# Altium PCB Reciever.PcbDoc
Units mm, origin at the board's own origin, x right, y up, seen from the top; angles counter-clockwise.
Board outline 55.75 x 46 mm, 2 copper layers (Top Layer, Bottom Layer); 9 components, 27 nets, 76 pads, 1 vias.
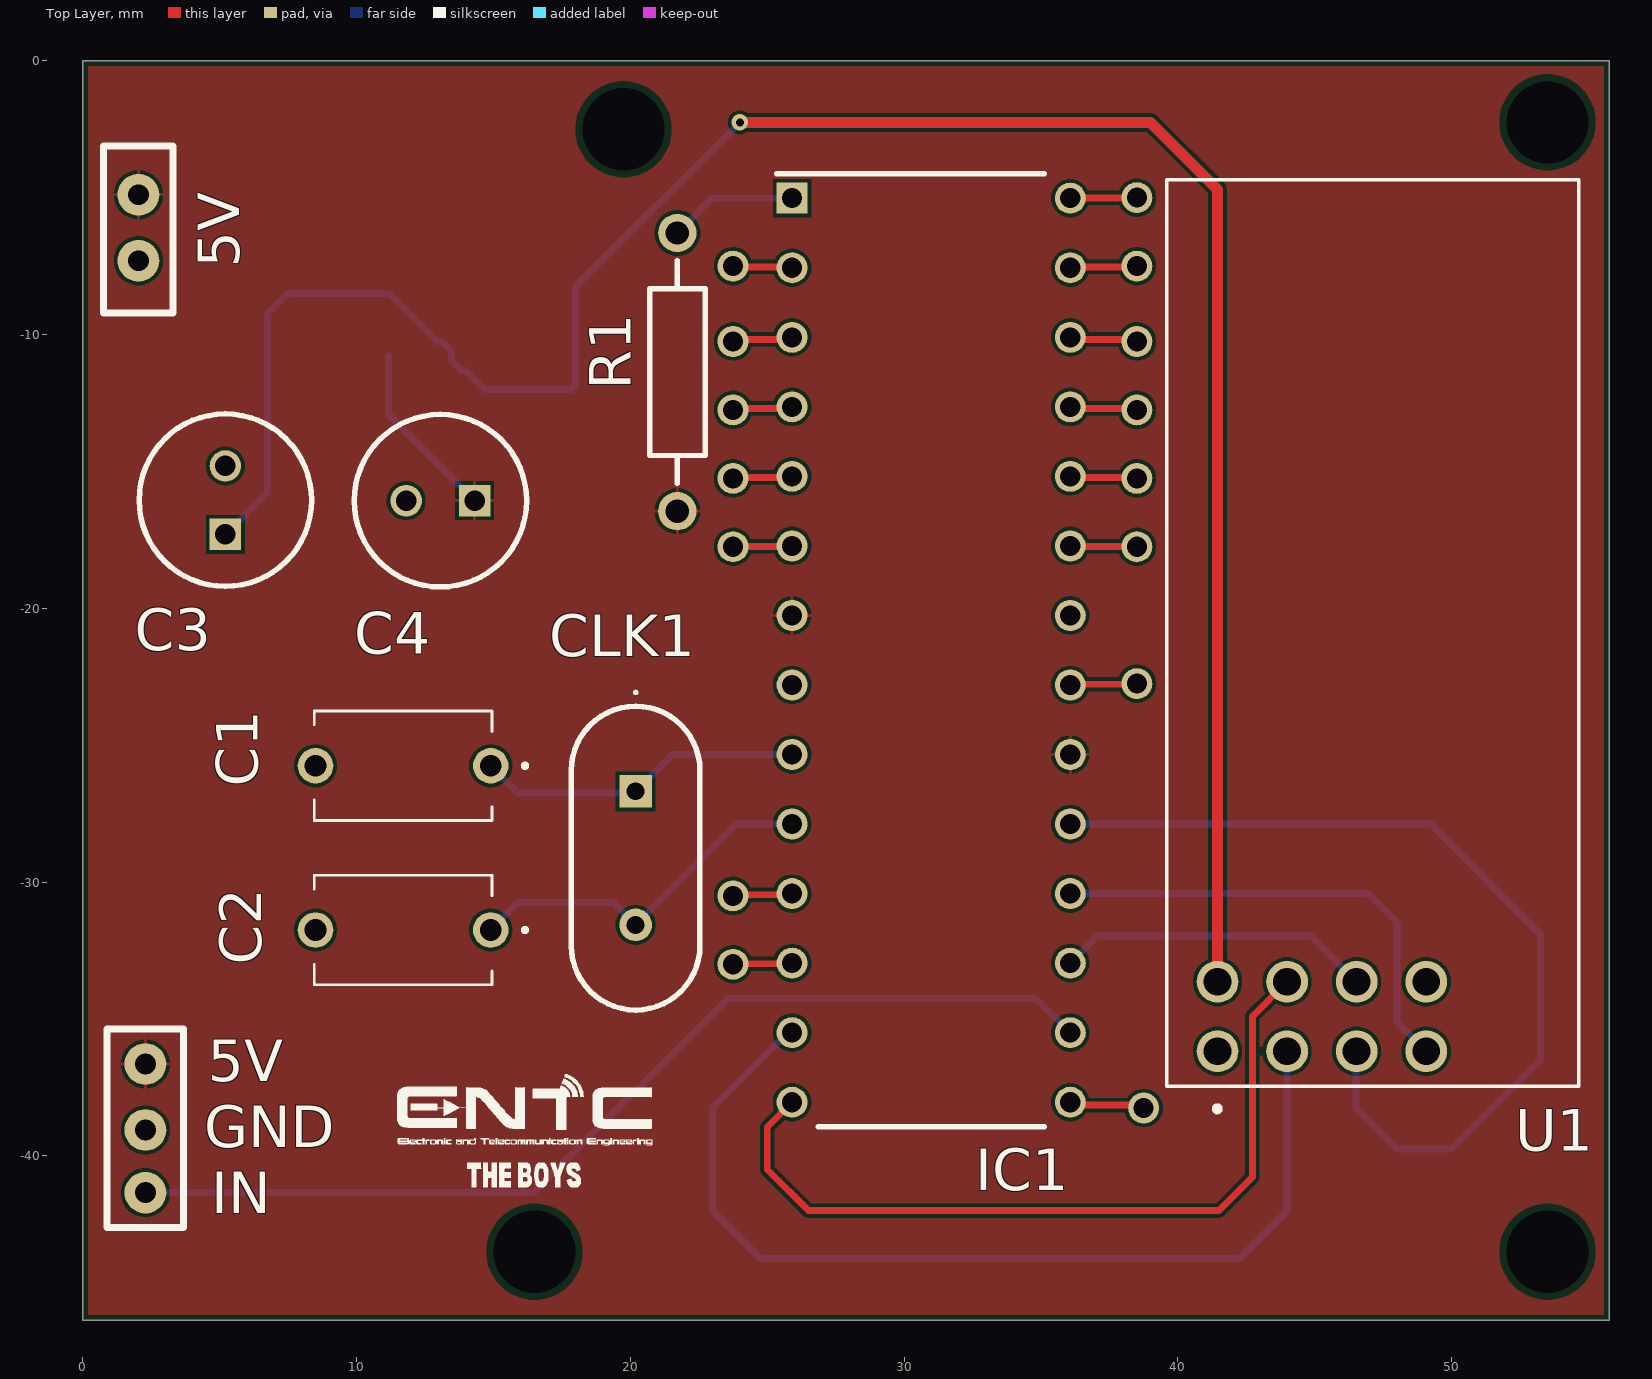
[diagram p0: Top Layer view]
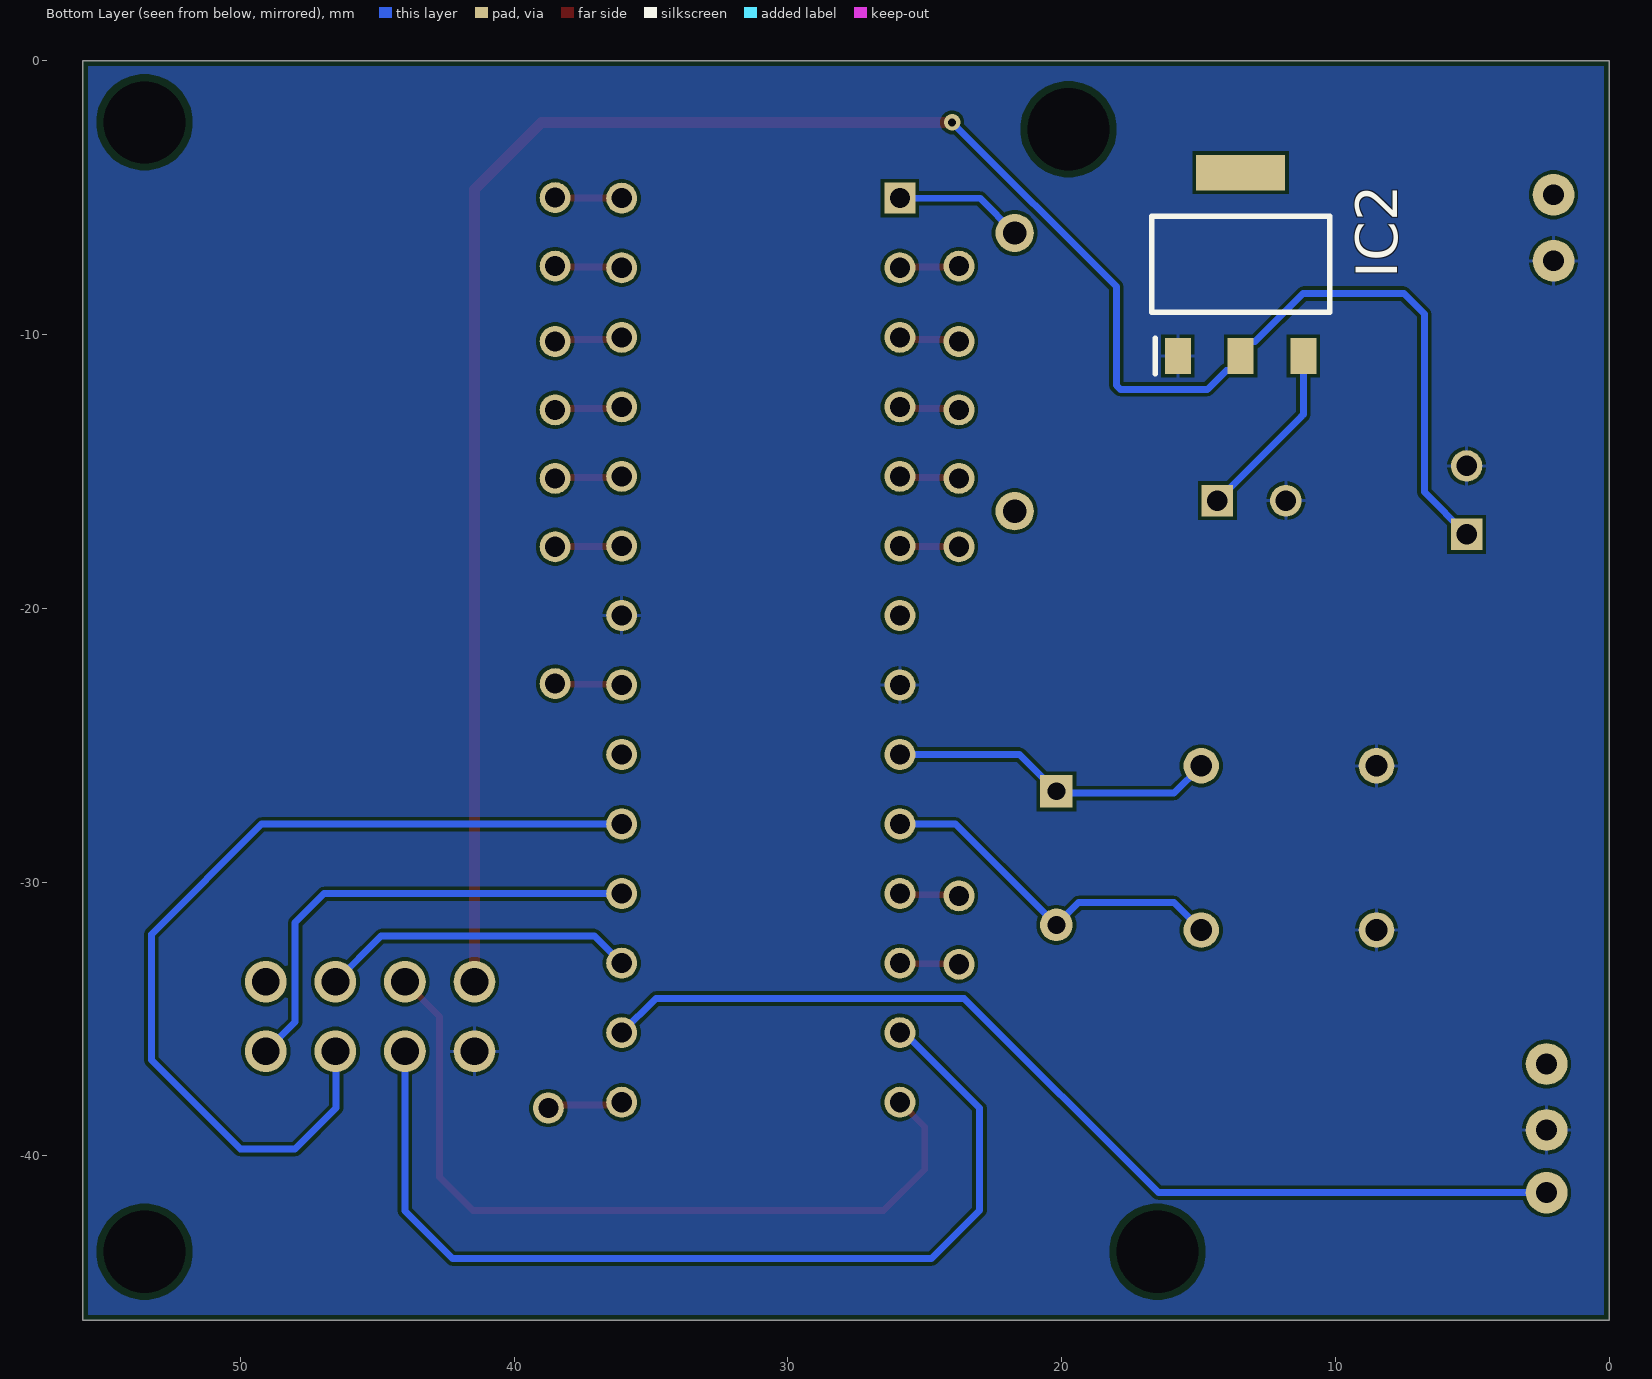
[diagram p1: Bottom Layer view, seen from below]
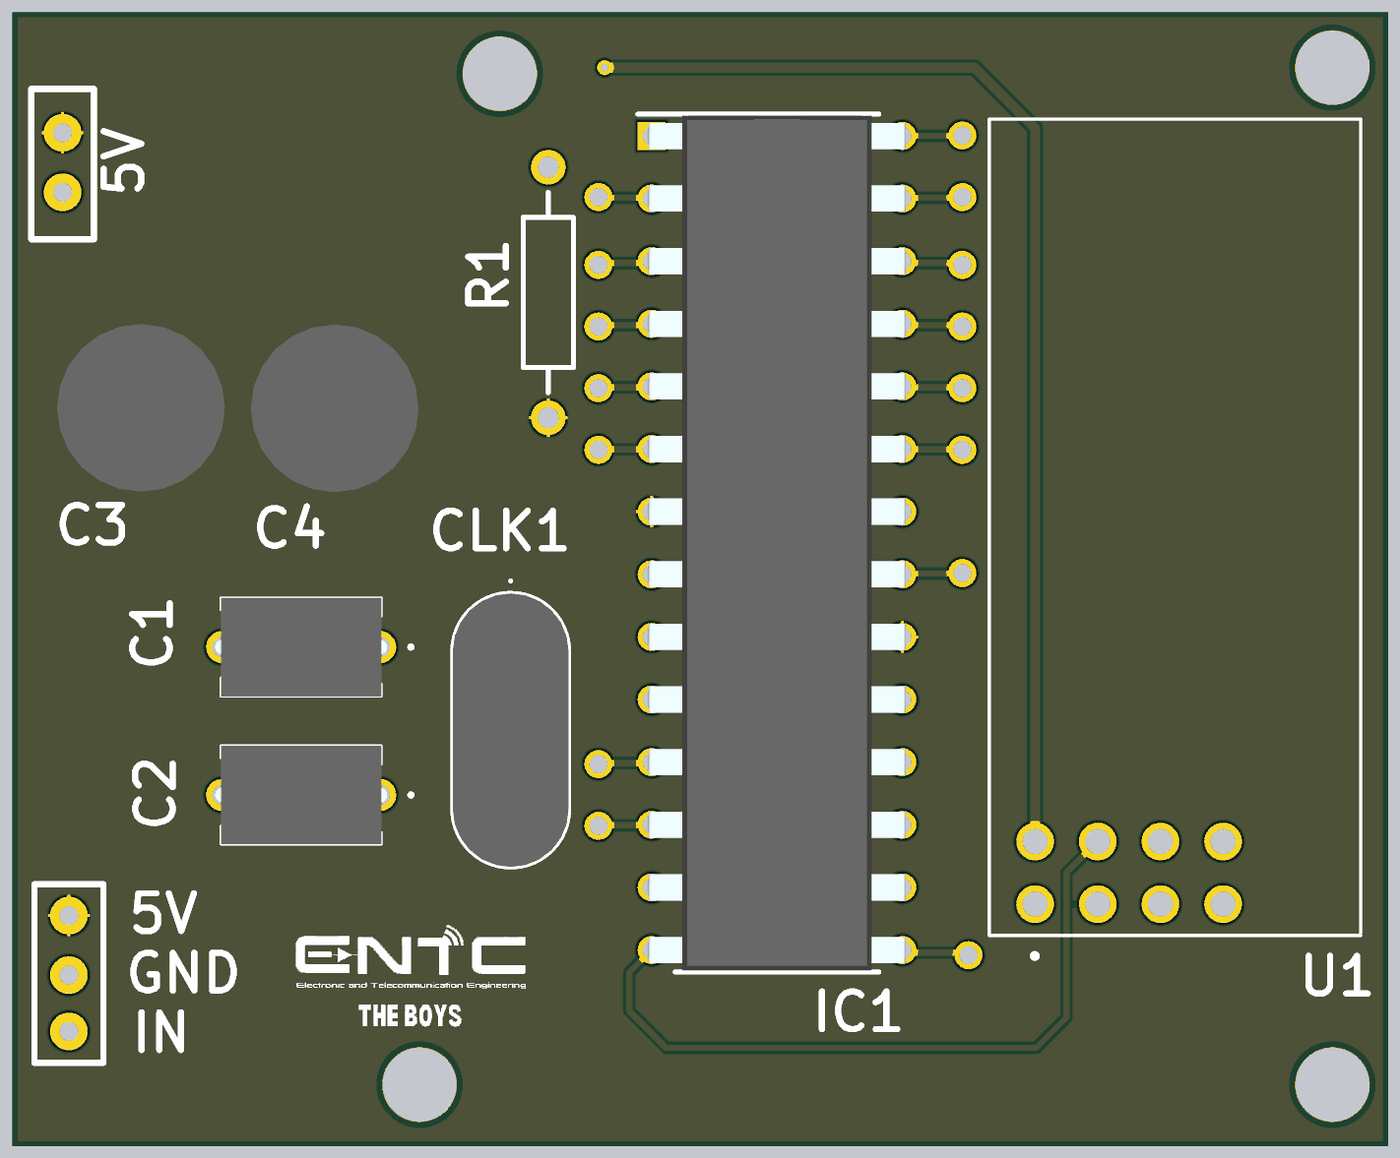
[diagram p2: 3D render of the assembled board from above, using the file's embedded part models]

## Layer stack, top to bottom
Top Solder: solder mask 0.0102, Solder Resist, Dk 3.5
Top Layer: signal copper 0.0356
Dielectric 1: dielectric 0.32, FR-4, Dk 4.8
Bottom Layer: signal copper 0.0356
Bottom Solder: solder mask 0.0102, Solder Resist, Dk 3.5

## Board outline
0,-46 55.753,-46 55.753,0 0,0

## Design rules (kind name [scope] priority, off if disabled: settings)
BoardOutlineClearance [All] p1: gap=0.2 ignorepadtopadclearanceinfootprint=FALSE
Clearance [All] p1: gap=0.127 ignorepadtopadclearanceinfootprint=FALSE except(0.25: Arc-Hole Track-Hole SMDPad-Hole THPad-Hole Via-Hole Fill-Hole Poly-Hole Region-Hole Text-Hole)
ComponentClearance [All] p1: gap=0.127 collisioncheckmode=3 verticalgap=0.127 showdistances=TRUE
DiffPairsRouting [All] p1: maxlimit=0.254 minlimit=0.127 mostfreqgap=0.127 toplayer_minwidth=0.127 toplayer_maxwidth=25.4 toplayer_prefwidth=0.127 bottomlayer_minwidth=0.127 bottomlayer_maxwidth=25.4 bottomlayer_prefwidth=0.127 maxuncoupledlength=12.7
Height [All] p1: minheight=0 maxheight=1816.048 prefheight=12.7
HoleSize [All] p1: absolutevalues=TRUE maxlimit=6.3 minlimit=0.3 maxpercent=80.000 minpercent=20.000
HoleToHoleClearance [All] p1: gap=0.25 allowstackedmicrovias=FALSE
MinimumAnnularRing [All] p1: minimumring=0.076
MinimumSolderMaskSliver [All] p1: minsoldermaskwidth=0
PlaneClearance [All] p1: clearance=0.127
PlaneConnect PlaneConnectPowerPads [InPadClass('PowerPads')] p1: planeconnectstyle=Direct reliefexpansion=0.508 reliefentries=4 reliefconductorwidth=0.254 reliefairgap=0.254
PlaneConnect [All] p2: pad.planeconnectstyle=Relief pad.reliefexpansion=0.3 pad.reliefentries=4 pad.reliefconductorwidth=0.127 pad.reliefairgap=0.127 via.planeconnectstyle=Direct via.reliefexpansion=0.3 via.reliefentries=4 via.reliefconductorwidth=0.127 via.reliefairgap=0.127
PolygonConnect PolygonConnectPowerPads [All vs (InPadClass('PowerPads'))] p1: connectstyle=Direct reliefconductorwidth=0.254 reliefentries=4 polygonreliefangle="90 Angle" airgapwidth=0.254
PolygonConnect [All] p2: thpad.connectstyle=Relief thpad.reliefconductorwidth=0.127 thpad.reliefentries=4 thpad.polygonreliefangle="90 Angle" thpad.airgapwidth=0.127 smdpad.connectstyle=Relief smdpad.reliefconductorwidth=0.127 smdpad.reliefentries=4 smdpad.polygonreliefangle="90 Angle" smdpad.airgapwidth=0.127 via.connectstyle=Direct via.reliefconductorwidth=0.127 via.reliefentries=4 via.polygonreliefangle="90 Angle" via.airgapwidth=0.127
RoutingVias [All] p1: holewidth=0.3 width=0.6 viastyle="Through Hole" minholewidth=0.3 minwidth=0.6 maxholewidth=0.6 maxwidth=6.6
SilkToSilkClearance [All] p1: silktosilkclearance=0
SilkToSolderMaskClearance [IsPad] p1: minsilkscreentomaskgap=0.127 clearancetoexposedcopper=TRUE
SolderMaskExpansion [All] p1: expansion=0.075 istentingtop=FALSE
Width [All] p1: maxlimit=25.4 minlimit=0.127 preferedwidth=0.127 minimp=50.000000 maximp=50.000000 favimp=50.000000
20 further rules are at their usual default settings.

## Components (designator, comment, footprint, x,y, rotation, side; value= is the part's Value field where it differs from the comment)
C1 "22pF" S220K25SL0N63L6R 14.9,-25.75 r180 top
C2 "22pF" S220K25SL0N63L6R 14.9,-31.75 r180 top
C3 "22uF Electrolytic" CAPPRD250W55D630H1220 5.207,-17.298 r90 top
C4 "22uF Electrolytic" CAPPRD250W55D630H1220 14.311,-16.068 r180 top
CLK1 "16MHz Crystal" LFXTAL036391Bulk 20.193,-26.682 r270 top
IC1 "ATMEGA328-PU" DIP1016W53P254L3468H457Q28N 30.988,-21.529 r0 top
IC2 "AMS1117-3.3" SOT229P700X180-4N 13.462,-7.432 r90 bottom
R1 "Res2" AXIAL-0.4 21.717,-11.369 r90 top value=10K
U1 "NRF24L01P-MODULE" XCVR_NRF24L01P-MODULE-PCB 47.117,-20.894 r90 top

## Footprints (in the part's own frame and the unit in brackets; to place one, negate y for a bottom-side part, rotate by r counter-clockwise, add the part's x,y. Pads: shape width x height; smd on the part's side, far side on the other; paste and mask are expansions set on the pad)
AXIAL-0.4 [mm] "Axial Device, Thru-Hole; 2 Leads; 0.4 in Pin Spacing"
  round 1.4 hole 0.85: 1(-5.08,0) 2(5.08,0)
  silkscreen extent -4.06,-1.02 4.06,1.02
CAPPRD250W55D630H1220 [mm]
  rect 1.15x1.15 hole 0.75: 1(0,0)
  round 1.15 hole 0.75: 2(2.5,0)
  silkscreen extent -1.9,-3.15 4.4,3.15, body extent -2.15,-3.4 4.65,3.4, height 12.2
DIP1016W53P254L3468H457Q28N [mm]
  rect 1.133x1.133 hole 0.733: 1(-5.08,16.51)
  round 1.133 hole 0.733: 2(-5.08,13.97) 3(-5.08,11.43) 4(-5.08,8.89) 5(-5.08,6.35) 6(-5.08,3.81) 7(-5.08,1.27) 8(-5.08,-1.27) 9(-5.08,-3.81) 10(-5.08,-6.35) 11(-5.08,-8.89) 12(-5.08,-11.43) 13(-5.08,-13.97) 14(-5.08,-16.51) 15(5.08,-16.51) 16(5.08,-13.97) 17(5.08,-11.43) 18(5.08,-8.89) 19(5.08,-6.35) 20(5.08,-3.81) 21(5.08,-1.27) 22(5.08,1.27) 23(5.08,3.81) 24(5.08,6.35) 25(5.08,8.89) 26(5.08,11.43) 27(5.08,13.97) 28(5.08,16.51)
  silkscreen extent -5.65,-17.4 4.13,17.4, body extent -5.21,-17.34 5.21,17.34, height 4.57
LFXTAL036391Bulk [mm]
  rect 1.192x1.192 hole 0.65: 1(0,0)
  round 1.192 hole 0.65: 2(4.88,0)
  silkscreen extent -3.66,-2.35 7.99,2.35, body extent -3.11,-2.35 7.99,2.35, height 4.2
S220K25SL0N63L6R [mm]
  round 1.3 hole 0.8: 1(0,0) 2(6.4,0)
  silkscreen extent -1.3,-2 6.45,2, body extent -0.3,-2 6.7,2, height 6.6
SOT229P700X180-4N [mm]
  rect 1.3x0.95 smd: 1(-3.35,2.29) 2(-3.35,0) 3(-3.35,-2.29)
  rect 1.3x3.25 smd: 4(3.35,0)
  silkscreen extent -4,-3.25 1.75,3.25, body extent -3.5,-3.25 3.5,3.25, height 1.8
XCVR_NRF24L01P-MODULE-PCB [mil]
  round 60 hole 40: 1(-601.75,223.18) 2(-501.75,223.18) 3(-601.75,123.18) 4(-501.75,123.18) 5(-601.75,23.18) 6(-501.75,23.18) 7(-601.75,-76.82) 8(-501.75,-76.82)
  silkscreen extent -688,-297 652,297

## Part data
C1 C2: library part S220K25SL0N63L6R, "Capacitor Ceramic THT", Manufacturer_Name=Vishay, Mouser Part Number=594-S220K25SL0N63L6R, Arrow Part Number=S220K25SL0N63L6R, Arrow Price/Stock=https://www.arrow.com/en/products/s220k25sl0n63l6r/vishay?region=nac, Datasheet Link=http://www.vishay.com/docs/28515/sseries.pdf, Height=6.5mm, Manufacturer_Part_Number=S220K25SL0N63L6R, Mouser Price/Stock=https://www.mouser.co.uk/ProductDetail/Vishay-BC-Components/S220K25SL0N63L6R?qs=a%252BZougrH3ehuV7s4gtTaOA%3D%3D
C3 C4: library part ECA1EEN220, "Capacitor Polarised", Manufacturer_Name=Panasonic, Datasheet Link=http://industrial.panasonic.com/cdbs/www-data/pdf/RDF0000/ABA0000C1044.pdf, Height=12.2mm, Manufacturer_Part_Number=ECA1EEN220
CLK1: library part LFXTAL036391Bulk, "Crystal or Oscillator", Manufacturer_Name=IQD, Mouser Part Number=449-LFXTAL036391BULK, Datasheet Link=https://componentsearchengine.com/Datasheets/1/LFXTAL036391Bulk.pdf, Height=4.1mm, Manufacturer_Part_Number=LFXTAL036391Bulk, Mouser Price/Stock=https://www.mouser.co.uk/ProductDetail/IQD/LFXTAL036391Bulk?qs=e4%2FAndAAwgLVSm%2FKWOsYLg%3D%3D
IC1: "Integrated Circuit", Manufacturer_Name=Microchip, Mouser Part Number=556-ATMEGA328-PU, Arrow Part Number=ATMEGA328-PU, Arrow Price/Stock=https://www.arrow.com/en/products/atmega328-pu/microchip-technology?region=nac, Datasheet Link=https://componentsearchengine.com/Datasheets/1/ATMEGA328-PU.pdf, Height=4.572mm, Manufacturer_Part_Number=ATMEGA328-PU, Mouser Price/Stock=https://www.mouser.co.uk/ProductDetail/Microchip-Technology/ATMEGA328-PU?qs=lwdSMh1%2FoYJT8tfItQpQtA%3D%3D
IC2: "Integrated Circuit", Manufacturer_Name="Advanced Monolithic Systems", Datasheet Link=http://www.advanced-monolithic.com/pdf/ds1117.pdf, Height=1.8mm, Manufacturer_Part_Number=AMS1117-3.3
R1: "Resistor", LatestRevisionDate=17-Jul-2002, LatestRevisionNote="Re-released for DXP Platform.", PackageDescription="Axial Device, Thru-Hole; 2 Leads; 0.4 in Pin Spacing", PackageReference=AXIAL-0.4, Published=8-Jun-2000, Publisher="Altium Limited"
U1: library part NRF24L01P-MODULE-PCB, "- Transceiver For Use With nRF24L01+", Package=None, Availability=Bad, MF="Nordic Semiconductor", Mouser-Purchase-URL=https://snapeda.com/shop?store=Mouser&id=230534, MP=NRF24L01P-MODULE-PCB, Price=None, SnapEDA_Link=https://www.snapeda.com/parts/NRF24L01P-MODULE-PCB/Nordic%20Semiconductor%20ASA/view-part/230534/?ref=snap

## Free pads (board coordinates)
  round 1.524 hole 0.762: 3(2.032,-4.892) 4(2.032,-7.305) 5(2.286,-36.642) 6(2.286,-39.055) 7(2.286,-41.341)
  rect 1.524x1.524 hole 3: 6(16.5,-43.5) 6(19.75,-2.5) 6(53.5,-43.5)
  round 1.133 hole 3: 8(53.5,-2.25)
  round 1.133 hole 0.733: 9(38.5,-5) 10(38.5,-7.5) 11(38.5,-10.25) 12(38.5,-12.75) 13(38.5,-15.25) 14(38.5,-17.75) 16(38.5,-22.75) 17(38.75,-38.25) 18(23.75,-33) 19(23.75,-30.5) 20(23.75,-17.75) 21(23.75,-15.25) 22(23.75,-12.75) 23(23.75,-10.25) 24(23.75,-7.5)

## Via types
v1: diameter 0.6, hole 0.3, Top Layer to Bottom Layer, 1 vias

## Nets (pads, with @x,y where several pads share a name; then routed paths per layer and width w, separated by ;. In a path a pad name is that pad's centre, name@x,y a point inside that pad or via, vN(x,y) a via of type N, cw(c..) or ccw(c..) an arc to the next point about the centre after c; other vN are vias at no path point)
2: IC1.2 pad.24 | length 2.2
  Top Layer w0.25: pad.24 23.78,-7.529 25.879,-7.529 IC1.2
3: IC1.3 pad.23 | length 2.2
  Top Layer w0.25: pad.23 23.825,-10.175 25.832,-10.175 IC1.3
3.3V: C3.1 IC2.2 U1.2 | length 81.5
  Top Layer w0.4: v1(24,-2.25) 39,-2.25 41.448,-4.698 U1.2
  Bottom Layer w0.25: C3.1 6.75,-15.755 6.75,-9.25 7.5,-8.5 11.18,-8.5 12.937,-10.257 13.112,-10.257 13.462,-10.607 IC2.2 13.462,-10.957 13.812,-11.307 13.987,-11.307 14.68,-12 17.854,-12 18,-11.854 18,-8.25 v1(24,-2.25)
4: IC1.4 pad.22 | length 2.2
  Top Layer w0.25: pad.22 23.805,-12.695 25.852,-12.695 IC1.4
5: IC1.5 pad.21 | length 2.2
  Top Layer w0.25: pad.21 23.785,-15.215 25.872,-15.215 IC1.5
5V: C4.1 IC1.7 IC1.20 IC2.3 pad.3 pad.5 R1.1 | length 6.6
  Bottom Layer w0.25: IC2.3 11.172,-12.922 11.25,-13 11.25,-13.007 C4.1
6: IC1.6 pad.20 | length 2.2
  Top Layer w0.25: pad.20 23.765,-17.735 25.892,-17.735 IC1.6
11: IC1.11 pad.19 | length 2.2
  Top Layer w0.25: pad.19 23.791,-30.459 25.867,-30.459 IC1.11
12: IC1.12 pad.18 | length 2.2
  Top Layer w0.25: pad.18 23.771,-32.979 25.887,-32.979 IC1.12
15: IC1.15 pad.17 | length 2.8
  Top Layer w0.25: IC1.15 36.173,-38.144 38.644,-38.144 pad.17
16: IC1.16 pad.7 | length 37.2
  Bottom Layer w0.25: pad.7 16.468,-41.341 23.559,-34.25 34.819,-34.25 IC1.16
21: IC1.21 pad.16 | length 2.5
  Top Layer w0.25: IC1.21 36.092,-22.775 38.475,-22.775 pad.16
23: IC1.23 pad.14 | length 2.4
  Top Layer w0.25: IC1.23 36.084,-17.735 38.485,-17.735 pad.14
24: IC1.24 pad.13 | length 2.5
  Top Layer w0.25: IC1.24 36.104,-15.215 38.465,-15.215 pad.13
25: IC1.25 pad.12 | length 2.5
  Top Layer w0.25: IC1.25 36.124,-12.695 38.445,-12.695 pad.12
26: IC1.26 pad.11 | length 2.5
  Top Layer w0.25: IC1.26 36.144,-10.175 38.425,-10.175 pad.11
27: IC1.27 pad.10 | length 2.5
  Top Layer w0.25: IC1.27 36.097,-7.529 38.47,-7.529 pad.10
28: IC1.28 pad.9 | length 2.4
  Top Layer w0.25: IC1.28 36.077,-5.009 38.49,-5.009 pad.9
CE: IC1.13 U1.3 | length 36.1
  Bottom Layer w0.25: IC1.13 25.751,-35.499 23,-38.25 23,-42 24.75,-43.75 42.25,-43.75 43.988,-42.012 U1.3
CLK_1: C1.1 CLK1.1 IC1.9 | length 12
  Bottom Layer w0.25: C1.1 15.9,-26.75 20.125,-26.75 CLK1.1 21.536,-25.339 IC1.9
CLK_2: C2.1 CLK1.2 IC1.10 | length 13.3
  Bottom Layer w0.25: C2.1 15.9,-30.75 19.381,-30.75 CLK1.2 23.876,-27.879 IC1.10
CSN: IC1.14 U1.4 | length 29.4
  Top Layer w0.25: IC1.14 25,-38.947 25,-40.5 26.5,-42 41.5,-42 42.723,-40.777 42.723,-34.904 U1.4
GND: C1.2 C2.2 C3.2 C4.2 IC1.8 IC1.22 IC2.1 pad.4 pad.6@2.286,-39.055 U1.1
MISO: IC1.18 U1.7 | length 17.5
  Bottom Layer w0.25: IC1.18 46.939,-30.419 48,-31.48 48,-35.11 U1.7
MOSI: IC1.17 U1.6 | length 11.6
  Bottom Layer w0.25: IC1.17 37.059,-31.968 44.858,-31.968 U1.6
NetIC1_1: IC1.1 R1.2 | length 4.7
  Bottom Layer w0.25: R1.2 22.987,-5.019 IC1.1
SCK: IC1.19 U1.5 | length 34.2
  Bottom Layer w0.25: IC1.19 49.225,-27.879 53.25,-31.904 53.25,-36.5 50,-39.75 48,-39.75 46.5,-38.25 46.5,-36.207 U1.5
pads on no net: IC2.4 U1.8

## Polygon pours and split planes (outlines as drawn)
GND on Bottom Layer "GND_L02_P000" (solid, remove dead copper, pour order 0): 0,0 55.75,0 55.75,-46 0,-46
5V on Top Layer "5V_L01_P001" (solid, remove dead copper, pour order 1): 0,0 55.75,0 55.75,-46 0,-46

## Silkscreen, mask and mechanical layers (free items; w line width, h text height)
Top Overlay:
  drawing of 65 lines, arcs and shapes, not listed
  text "5V" at 5.715,-7.559 h1.52 r90
  text "5V" at 4.572,-37.277 h1.52
  text "GND" at 4.445,-39.69 h1.52
  text "IN" at 4.699,-42.103 h1.52